# EAGLE board Esquematico_PCB_DIY_V1 (EAGLE 6.6.0)
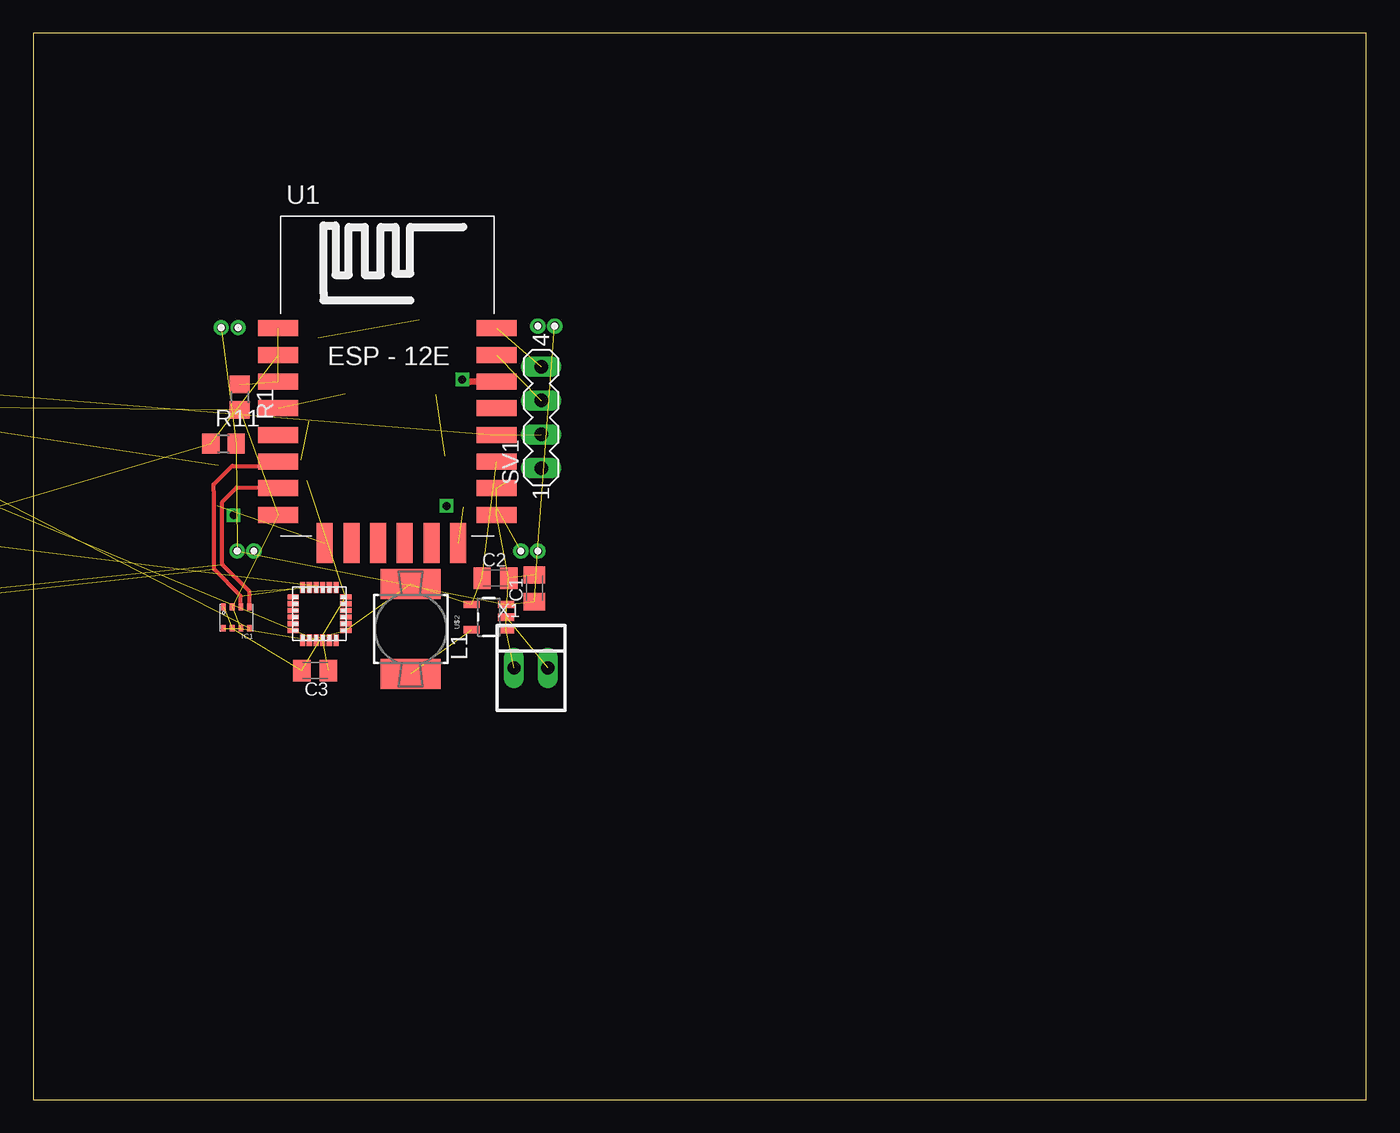
[diagram p0: board, top side]
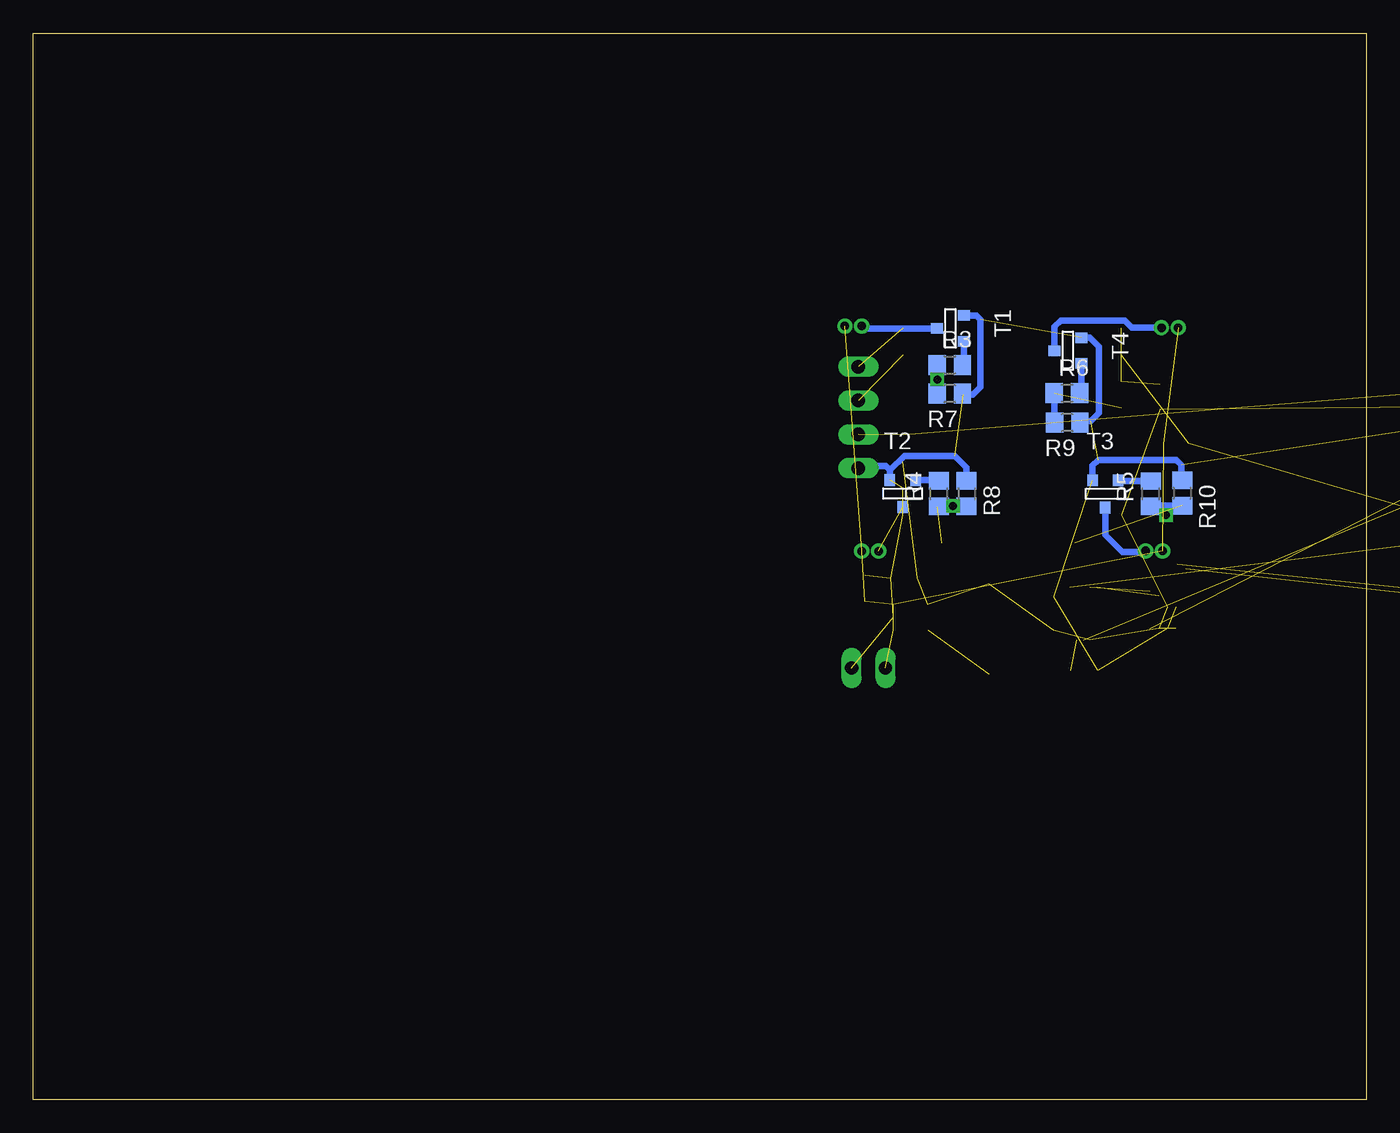
[diagram p1: board, bottom side, seen from below]

Size 100 x 80 mm. Coordinates in mm from the lower left corner, seen from the top.
Outline: 0,0 100,0 100,80 0,80 0,0
Copper layers (1*16): Top 0.035mm / dielectric 1.5mm / Bottom 0.035mm
Design rules "default *": minimum track width 0.256mm, minimum drill 24mil, track to track 8mil, track to pad 8mil, pad to pad 8mil, via to via 8mil, smd to smd 8mil, copper to edge 40mil, drill to drill 8mil, minimum pad ring 10mil, minimum via ring 8mil, stop-mask expansion 4mil, vias tented up to drill 0mil, thermal gap 10mil

## Footprints (pad centres in the part's own frame; a part is rotated, then mirrored left to right if it is on the bottom)
C0805K = smd 1.3 x 1.6: 1 -1,0; 2 1,0
BMP280 = smd 0.35 x 0.5: 1 0.975,-0.8; 2 0.325,-0.8; 3 -0.325,-0.8; 4 -0.975,-0.8; 5 -0.975,0.8; 6 -0.325,0.8; 7 0.325,0.8; 8 0.975,0.8
MS85 = smd 4.5 x 2.25: 1 0,-3.383; 2 0,3.383
R0805 = smd 1.3 x 1.5: 1 -0.95,0; 2 0.95,0
MA04-1 = drill 1.016 long: 1 -3.81,0; 2 -1.27,0; 3 1.27,0; 4 3.81,0
SOT-23 = smd 0.787 x 0.889: 1 0.025,-1.016; 2 -0.94,1.016; 3 0.991,1.016
ESP12E-SMD = smd 3 x 1.2: ADC -8.3,3.8; CH_PD -8.3,1.8; GND 8.1,-8.2; GPIO0 8.1,-2.2; GPIO2 8.1,-4.2; GPIO4 8.1,-0.2; GPIO5 8.1,1.8; GPIO12 -8.3,-4.2; GPIO13 -8.3,-6.2; GPIO14 -8.3,-2.2; GPIO15 8.1,-6.2; GPIO16 -8.3,-0.2; RESET -8.3,5.8; RXD0 8.1,3.8; TXD0 8.1,5.8; VCC -8.3,-8.2 | smd 1.2 x 3: CS0 -4.8,-10.3; GPIO9 -0.8,-10.3; GPIO10 1.2,-10.3; MISO -2.8,-10.3; MOSI 3.2,-10.3; SCLK 5.2,-10.3
QFN.24.4X4 = smd 0.85 x 0.38: 1 -1.975,1.25; 2 -1.975,0.75; 3 -1.975,0.25; 4 -1.975,-0.25; 5 -1.975,-0.75; 6 -1.975,-1.25; 13 1.975,-1.25; 14 1.975,-0.75; 15 1.975,-0.25; 16 1.975,0.25; 17 1.975,0.75; 18 1.975,1.25 | smd 0.38 x 0.85: 7 -1.25,-1.975; 8 -0.75,-1.975; 9 -0.25,-1.975; 10 0.25,-1.975; 11 0.75,-1.975; 12 1.25,-1.975; 19 1.25,1.975; 20 0.75,1.975; 21 0.25,1.975; 22 -0.25,1.975; 23 -0.75,1.975; 24 -1.25,1.975
SOT23-5 = smd 0.55 x 1.2: 1 -0.95,-1.3; 2 0,-1.3; 3 0.95,-1.3; 4 0.95,1.3; 5 -0.95,1.3
1X2 = drill 0.635 pad 1.016: 1 0,0; 2 1.27,0
22-23-2021 = drill 1 long: 1 -1.27,0; 2 1.27,0

## Placement (x,y rotation side)
C1  4u7  [C0805K]  37.59,38.35 90 top
C2  47uF  [C0805K]  34.67,39.12 0 top
C3  0.1uF  [C0805K]  21.14,32.19 180 top
C4  2.2nF  [C0805K]  -45.72,46.99 0 top  (outside the outline)
C5  10nF  [C0805K]  -31.75,52.07 0 top  (outside the outline)
C6  0.1uF  [C0805K]  -50.8,46.99 0 top  (outside the outline)
C7  0.1uF  [C0805K]  -16.51,52.07 0 top  (outside the outline)
C8  10nF  [C0805K]  -36.83,52.07 0 top  (outside the outline)
C9  47uF  [C0805K]  -41.91,52.07 0 top  (outside the outline)
C10  0.1uF  [C0805K]  -21.59,52.07 0 top  (outside the outline)
C11  10nF  [C0805K]  -46.99,52.07 0 top  (outside the outline)
IC1  BMP280  [BMP280]  15.25,36.15 180 top
L1  4u7  [MS85]  28.32,35.31 0 top
R1  10K  [R0805]  15.49,52.7 270 top
R2  [R0805]  -40.64,55.88 0 top  (outside the outline)
R3  10  [R0805]  31.24,55.12 0 bottom
R4  10  [R0805]  32.07,45.46 90 bottom
R5  10  [R0805]  16.16,45.45 90 bottom
R6  10  [R0805]  22.45,52.99 0 bottom
R7  10K  [R0805]  31.24,52.96 180 bottom
R8  10K  [R0805]  29.98,45.47 270 bottom
R9  10K  [R0805]  22.43,50.78 180 bottom
R10  10K  [R0805]  13.81,45.5 270 bottom
R11  10K  [R0805]  14.27,49.2 0 top
R12  10K  [R0805]  -40.64,33.02 0 top  (outside the outline)
R13  [R0805]  -16.51,55.88 0 top  (outside the outline)
R14  [R0805]  -22.86,55.88 0 top  (outside the outline)
R15  [R0805]  -29.21,55.88 0 top  (outside the outline)
R16  [R0805]  -35.56,55.88 0 top  (outside the outline)
R17  1K  [R0805]  -46.99,33.02 0 top  (outside the outline)
R18  1K  [R0805]  -53.34,33.02 0 top  (outside the outline)
SV1  [MA04-1]  38.1,51.18 90 top
T1  [SOT-23]  31.19,57.88 270 bottom
T2  [SOT-23]  34.8,45.47 0 bottom
T3  [SOT-23]  19.6,45.45 0 bottom
T4  [SOT-23]  22.38,56.21 270 bottom
U1  [ESP12E-SMD]  26.67,52.07 0 top
U$1  MPU-6050  [QFN.24.4X4]  21.46,36.45 0 top
U$2  LM3671  [SOT23-5]  34.16,36.2 90 top
U$3  1X2  [1X2]  37.85,58.04 0 top
U$4  1X2  [1X2]  36.58,41.15 0 top
U$5  1X2  [1X2]  16.55,41.16 180 top
U$6  1X2  [1X2]  15.37,57.91 180 top
X1  22-23-2021  [22-23-2021]  37.34,32.38 0 top

## Library data of the parts
C1-C11 R1-R18 = rcl
IC1 = bosch-bmp280
L1 = inductor-neosid; OC_FARNELL: unknown; OC_NEWARK: unknown
SV1 = con-lstb; OC_FARNELL: unknown; OC_NEWARK: unknown
T1-T4 = zetex; OC_FARNELL: unknown; OC_NEWARK: unknown
U1 = esp8266modules
U$1 = invensense
U$2 = texas-custom
U$3-U$6 = headers(.05in)
X1 = con-molex; MF: MOLEX; MPN: 22-23-2021; OC_FARNELL: 1462926; OC_NEWARK: 25C3832

## Nets
ADC: R11.1 R12.1 U1.ADC
BOOT: R2.2 SV1.2 U1.GPIO0
GND: C1.2 C2.2 C3.2 C4.2 C5.2 C6.2 C7.2 C8.2 C9.2 C10.2 C11.2 IC1.1 IC1.7 R7.1 R8.1 R9.1 R10.1 R12.2 R13.1 R16.1 SV1.1 T1.2 T2.2 T3.2 T4.2 U1.GND U1.GPIO15 U$1.18 U$2.2 X1.2
I2C_SCL: IC1.4 R18.1 U1.GPIO13 U$1.23
I2C_SDA: IC1.3 R17.1 U1.GPIO12 U$1.24
N$1: R1.1 U1.CH_PD U1.RESET
N$2: R3.2 T1.3
N$3: L1.1 U$2.5
N$4: R4.2 T2.3
N$5: R5.2 T3.3
N$6: R6.2 T4.3
N$7: IC1.5 R13.2 R14.1
N$8: R15.1 R16.2 U$1.9
N$9: T3.1 U$5.1
N$10: C3.1 U$1.10
N$11: C4.1 U$1.20
N$12: U$1.12
N$13: T4.1 U$6.1
N$14: T2.1 U$4.1
N$16: T1.1 U$3.1
PWM0: R3.1 R7.2 U1.GPIO5
PWM1: R4.1 R8.2 U1.SCLK
PWM2: R5.1 R10.2 U1.CS0
PWM3: R6.1 R9.2 U1.GPIO16
RX: SV1.3 U1.RXD0
TX: SV1.4 U1.TXD0
V+: C1.1 R11.2 U$2.1 U$2.3 U$3.2 U$4.2 U$5.2 U$6.2 X1.1
VCC: C2.1 C5.1 C6.1 C7.1 C8.1 C9.1 C10.1 C11.1 IC1.2 IC1.6 IC1.8 L1.2 R1.2 R2.1 R14.2 R15.2 R17.2 R18.2 U1.GPIO2 U1.VCC U$1.8 U$1.13 U$2.4

## Tracks (layer width: path | path; a pad name or v marks a point on that pad's centre or on a via)
ADC  (2 unrouted)
BOOT  (2 unrouted)
GND  (24 unrouted)
  Bottom 0.5: T2.2 35.74,47.21 | 35.74,47.21 36.05,47.52 37.95,47.52 SV1.1 | R8.1 29.98,47.4 30.88,48.3 34.65,48.3 35.74,47.21 | T4.2 20.73,57.15 20.07,56.5 20.07,51.52 20.68,50.92 21.34,50.92 R9.1 | T1.2 29.25,58.83 28.95,58.52 28.95,53.48 29.52,52.9 30.23,52.9 R7.1 | T3.2 20.54,47.56 20.1,48 14.25,48 13.88,47.62 13.88,46.52 R10.1
I2C_SCL  (2 unrouted)
  Top 0.3: IC1.4 16.22,38.1 14.18,40.15 14.18,44.85 15.25,45.92 18.32,45.92 U1.GPIO13
I2C_SDA  (2 unrouted)
  Top 0.3: IC1.3 15.57,37.78 13.55,39.8 13.55,45.65 13.53,45.67 13.53,46.15 14.93,47.55 18.05,47.55 U1.GPIO12
N$1  (2 unrouted)
N$2
  Bottom 0.5: T1.3 30.18,55.23 R3.2
N$3  (1 unrouted)
N$4
  Bottom 0.5: T2.3 32.13,46.48 R4.2
N$5
  Bottom 0.5: R5.2 18.55,46.4 T3.3
N$6
  Bottom 0.5: T4.3 21.36,53.13 R6.2
N$7  (2 unrouted)
N$8  (2 unrouted)
N$9
  Bottom 0.5: T3.1 19.58,42.35 18.3,41.08 16.64,41.08 U$5.1
N$10  (1 unrouted)
N$11  (1 unrouted)
N$13
  Bottom 0.5: U$6.1 17.59,57.91 18.12,58.45 22.93,58.45 23.39,57.98 T4.1
N$14  (1 unrouted)
N$15  (via drill 0.6)
  other vias: 32.17,54.02
N$16
  Bottom 0.5: T1.1 37.67,57.86 U$3.1
N$17  (via drill 0.6)
  other vias: 31,44.55
N$18  (via drill 0.6)
  other vias: 15.03,43.85
PWM0  (1 unrouted)
  Top 0.5: U1.GPIO5 32.3,53.87 32.19,53.98
  Bottom 0.5: R3.1 R7.2
PWM1  (1 unrouted)
  Bottom 0.3: R8.2 R4.1
  Bottom 0.5: R4.1 30.24,44.51 30.07,44.67 32.23,44.48
PWM2  (1 unrouted)
  Bottom 0.5: R10.2 16.12,44.55 R5.1
PWM3  (1 unrouted)
  Bottom 0.5: R9.2 23.38,52.97 R6.1
RX  (1 unrouted)
TX  (1 unrouted)
V+  (8 unrouted)
VCC  (22 unrouted)